# Altium PCB flowSensorV2.PcbDoc
Units mil, origin at the board's own origin, x right, y up, seen from the top; angles counter-clockwise.
Board outline 700 x 1550 mil, 2 copper layers (Top Layer, Bottom Layer); 19 components, 8 nets, 30 pads, 2 vias.
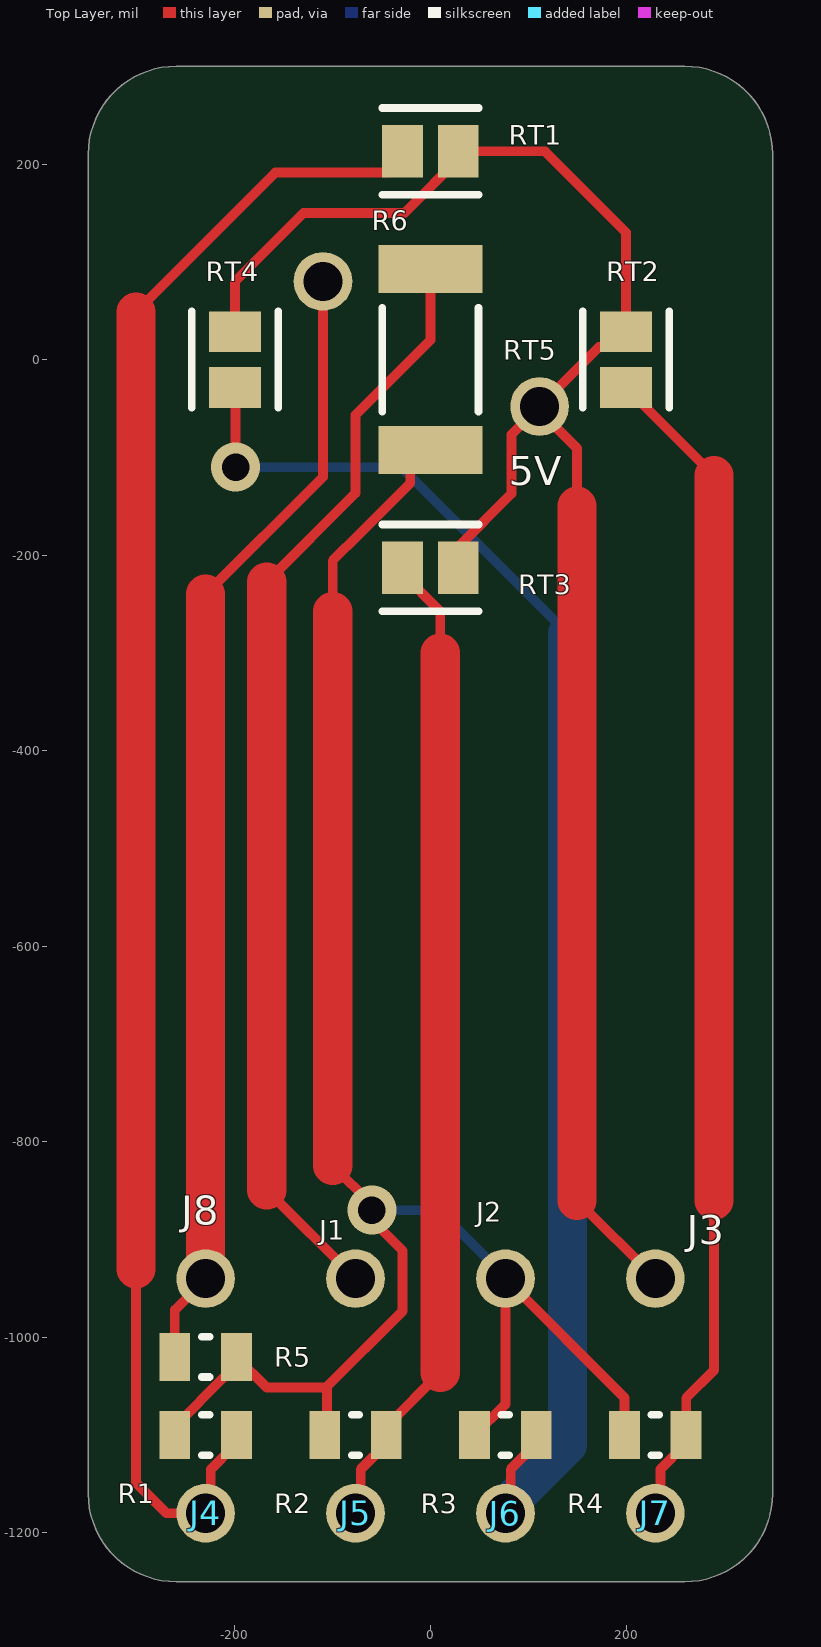
[diagram p0: Top Layer view]
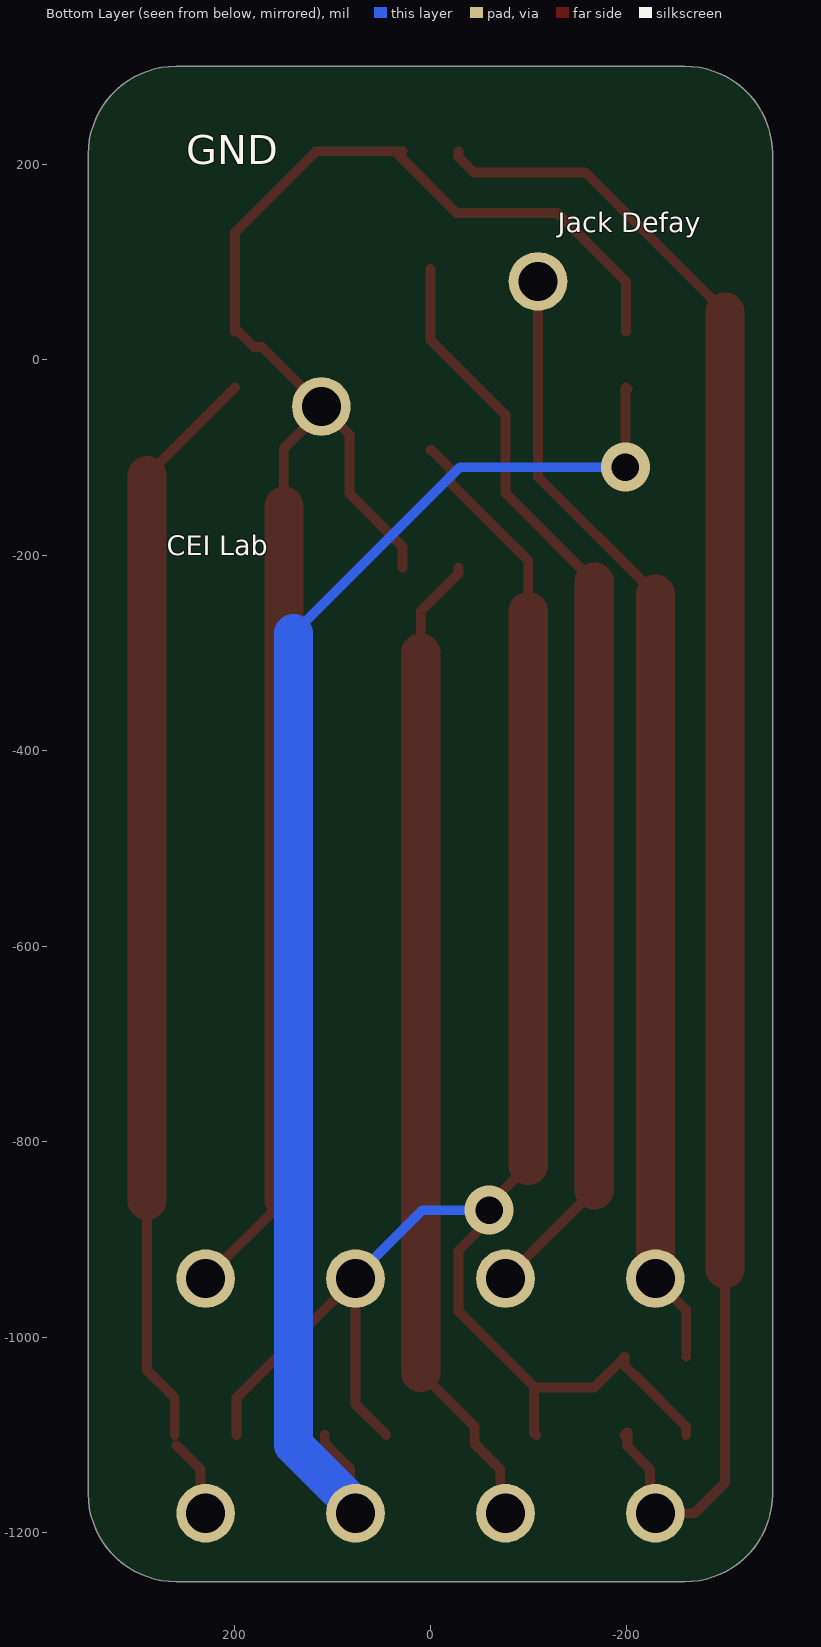
[diagram p1: Bottom Layer view, seen from below]
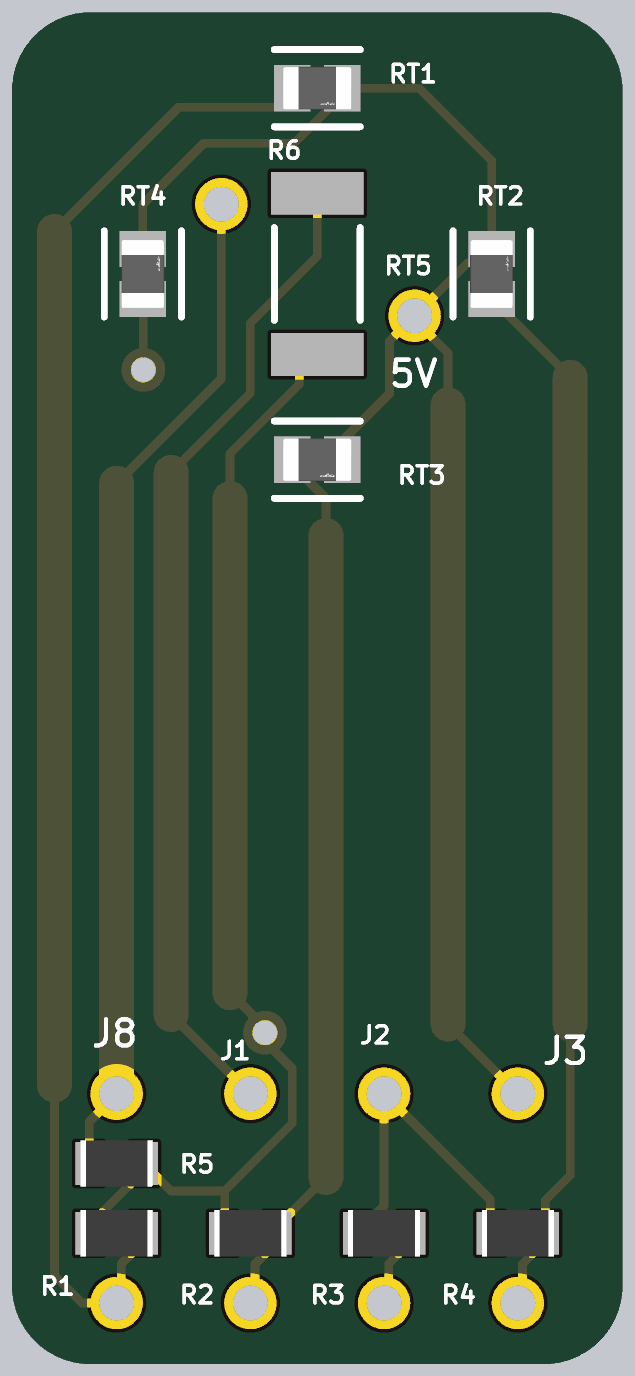
[diagram p2: 3D render of the assembled board from above, using the file's embedded part models]

## Layer stack, top to bottom
Top Solder: solder mask 0.4, Solder Resist, Dk 3.5
Top Layer: signal copper 1.4
Dielectric 1: dielectric 12.6, FR-4, Dk 4.8
Bottom Layer: signal copper 1.4
Bottom Solder: solder mask 0.4, Solder Resist, Dk 3.5

## Board outline
-350,-1160 ccw(c-260,-1160) -260,-1250 260,-1250 ccw(c260,-1160) 350,-1160 350,210 ccw(c260,210) 260,300 -260,300 ccw(c-260,210) -350,210
cut-out: -350,351.5

## Design rules (kind name [scope] priority, off if disabled: settings)
Clearance [All] p1: gap=4 ignorepadtopadclearanceinfootprint=FALSE except(0: Arc-Hole Track-Hole SMDPad-Hole THPad-Hole Via-Hole Fill-Hole Poly-Hole Region-Hole Text-Hole)
MinimumSolderMaskSliver [All] p1: minsoldermaskwidth=4
PolygonConnect [All] p1: connectstyle=Relief reliefconductorwidth=10 reliefentries=4 polygonreliefangle="90 Angle" airgapwidth=10
RoutingVias [All] p1: holewidth=28 width=50 viastyle="Through Hole" minholewidth=28 minwidth=50 maxholewidth=28 maxwidth=50
SilkToSolderMaskClearance [IsPad] p1: minsilkscreentomaskgap=5 clearancetoexposedcopper=TRUE
SolderMaskExpansion [All] p1: expansion=4 istentingtop=FALSE
Width [All] p1: maxlimit=50 minlimit=10 preferedwidth=10 minimp=50.000000 maximp=50.000000 favimp=50.000000
28 further rules are at their usual default settings.

## Classes and differential pairs
component class [04]-Connector: J1 J2 J3 J4 J5 J6 J7 J8
component class "[03]-Heating Element": R6
component class [02]-Thermistors: R1 R3 R4 R5 RT5

## Components (designator, comment, footprint, x,y, rotation, side; value= is the part's Value field where it differs from the comment)
J1 "20v" PIN#1 -76.67,-940 r0 top
J2 "GND" PIN#1 76.67,-940 r0 top
J3 "20v" PIN#1 230,-940 r0 top
J4 "GND" PIN#1 -230,-1180 r0 top
J5 "GND" PIN#1 -76.67,-1180 r0 top
J6 "GND" PIN#1 76.67,-1180 r0 top
J7 "GND" PIN#2 205.94,-1180 r0 top
J8 "GND" PIN#1 -230,-940 r0 top
R1 "RC0805FR-0710KL" RESC2013X60X35LL10T20 -230,-1100 r0 top
R2 "RC0805FR-0710KL" RESC2013X60X35LL10T20 -76.67,-1100 r0 top (schematic designator R3)
R3 "RC0805FR-0710KL" RESC2013X60X35LL10T20 76.67,-1100 r0 top (schematic designator R4)
R4 "RC0805FR-0710KL" RESC2013X60X35LL10T20 230,-1100 r0 top (schematic designator R2)
R5 "RC0805FR-0710KL" RESC2013X60X35LL10T20 -230,-1020 r180 top
R6 "16R9 1% 2010(5025)" RESC2010(5025)_N 0,0 r90 top value="16.90 Ohm"
RT1 "NCP21XV103J03RA" FP-NCP21-0_2-IPC_C 0,213 r0 top
RT2 "NCP21XV103J03RA" FP-NCP21-0_2-IPC_C 200,0 r90 top
RT3 "NCP21XV103J03RA" FP-NCP21-0_2-IPC_C 0,-213 r0 top
RT4 "NCP21XV103J03RA" FP-NCP21-0_2-IPC_C -200,0 r90 top
RT5 "" thermistor -110,80 r330 top

## Footprints (in the part's own frame and the unit in brackets; to place one, negate y for a bottom-side part, rotate by r counter-clockwise, add the part's x,y. Pads: shape width x height; smd on the part's side, far side on the other; paste and mask are expansions set on the pad)
FP-NCP21-0_2-IPC_C [mil]
  rect 41.52x53.39 smd paste+0 mask+0: 1(-28.57,0) 2(28.57,0)
  silkscreen extent -49,-44 49,44, body extent -53,-32 53,32, height 10
PIN#1 [mil]
  round 60 hole 40: 1(0,0)
PIN#2 [mil]
  round 60 hole 40: 1(24.06,0)
RESC2010(5025)_N [mm] "Chip Resistor, Body 5.0x2.5mm, IPC Medium Density"
  rect 1.25x2.7 smd: 1(-2.35,0) 2(2.35,0)
  silkscreen extent -1.35,-1.25 1.35,1.25, body extent -2.6,-1.35 2.6,1.35, height 0.71
RESC2013X60X35LL10T20 [mm] "Chip Resistor, 2-Leads, Body 2.1x1.35mm, IPC High Density"
  rect 0.8x1.25 smd: 1(-0.8,0) 2(0.8,0)
  silkscreen extent -0.1,-0.53 0.1,0.53, body extent -1.05,-0.67 1.05,0.68, height 0.6
thermistor [mil]
  round 60 hole 40: 0(0,0) 1(255.91,0)

## Part data
R1 R2 R3 R4 R5: library part CMP-1659-00013-4, "Chip Resistor, 10 KOhm, +/- 1%, 0.125 W, -55 to 155 degC, 0805 (2012 Metric), RoHS, Tape and Reel", Manufacturer=Yageo, Max Operating Temperature="155 degC", Min Operating Temperature="-55 degC", Package Quantity=5000, Voltage Rating="150 V", ComponentLink1Description="Manufacturer URL", ComponentLink1URL=http://www.yageo.com/, ComponentLink2Description=Datasheet, ComponentLink2URL=http://www.yageo.com/documents/recent/PYu-RC_Group_51_RoHS_L_04.pdf, DatasheetVersion="Rev. 4, 02/2016", Height="0.5 mm", Length="2 mm", Mount="Surface Mount", Mounting Technology="Surface Mount", PackageDescription="2-Pin Surface Mounted Device, Body 2 x 1.25 mm", PackageReference=0805, Packaging="Tape and Reel", Pins=2, REACH SVHC="No SVHC", RoHSCompliant=true
R6: library part CMP-1017-00308-1, "16R9 0.75W 1% 2010 (5025 Metric)  SMD", Case-EIA=2010, Case-Metric=5025, Power="0.75 W", Tolerance="1 %", Technology=SMT
RT1 RT2 RT3 RT4: library part CMP-2000-06827-2, "THERMISTOR NTC 10KOHM 3900K 0805", Case Code (Imperial)=0805, Case Code (Metric)=2012, Current Rating=440uA, Max Operating Temperature=125°C, Max Power Dissipation=200mW, Min Operating Temperature=-40°C, Package Quantity=4000, Resistance=10kR, Tolerance=5%, Accuracy=3%, Case/Package=0805, Depth=1.25mm, Height=0.85mm, Lead Free="Lead Free", Length=2mm, Mount="Surface Mount", Number of Pins=2, Packaging="Tape and Reel", Power Rating=200mW, Radiation Hardening=No, REACH SVHC="No SVHC", Termination=SMD/SMT, Thickness=150um
RT5: library part thermistor

## Via types
v1: diameter 50, hole 28, Top Layer to Bottom Layer, tented both sides, 2 vias

## Nets (pads, with @x,y where several pads share a name; then routed paths per layer and width w, separated by ;. In a path a pad name is that pad's centre, name@x,y a point inside that pad or via, vN(x,y) a via of type N, cw(c..) or ccw(c..) an arc to the next point about the centre after c; other vN are vias at no path point)
5V: J3.1 RT1.2 RT2.2 RT3.2 RT4.2 RT5.1 | length 1906.8
  Top Layer w10: RT4.2 -200,80 -130,150 -26.58,150 RT1.2@32.48,209.06 ; RT3.2 28.57,-191.43 82.83,-137.17 82.83,-76.74 RT5.1 ; RT1.2 117,213 200,130 RT2.2@200,32.48 ; 150,-860 J3.1 ; 150,-150 150,-90.69 111.62,-52.32 RT5.1 ; RT2.2 RT2.2@200,32.48 ; RT5.1 172.45,12.87 180.39,12.87 RT2.2@200,32.48
  Top Layer w40: 150,-860 150,-150
15V: J1.1 R6.2 | length 1139.5
  Top Layer w10: -167.49,-849.17 J1.1 ; -167.49,-227.49 -76.67,-136.67 -76.67,-56.67 0,20 R6.2
  Top Layer w40: -167.49,-849.17 -167.49,-227.49
GND: J2.1 R1.1 R2.1 R3.1 R4.1 R5.1 R6.1 | length 1881.1
  Top Layer w10: R1.1 -261.5,-1091.14 -209.96,-1039.61 -209.25,-1039.61 -198.5,-1028.86 R5.1@-198.5,-1020.49 ; R5.1 R5.1@-198.5,-1020.49 ; R2.1 -105.94,-1097.78 -105.94,-1051.5 -106.68,-1051.5 ; -100,-824.14 -60,-864.14 -60,-880 -28.57,-911.43 -28.57,-973.39 -106.68,-1051.5 ; -100,-257.51 -100,-205.67 -71.64,-177.3 -20.6,-126.27 -20.6,-112.13 -1,-92.52 R6.1 ; R3.1 76.67,-1068.5 J2.1 198.5,-1061.84 R4.1 ; R5.1@-198.5,-1020.49 -167.49,-1051.5 -106.68,-1051.5
  Top Layer w40: -100,-824.14 -100,-257.51
  Bottom Layer w10: v1(-60,-870) 8.33,-870 76.67,-938.33 J2.1 J2.1@70,-940
read0: J8.1 R5.2 RT5.0 | length 1162.8
  Top Layer w10: R5.2 -261.5,-972.14 -230,-940.65 J8.1 ; -230,-240 -110,-120 RT5.0
  Top Layer w40: J8.1 -230,-240
read1: J4.1 R1.2 RT1.1 | length 1724.8
  Top Layer w10: -301.24,-930 -301.24,-1148.76 -270,-1180 J4.1 -224.65,-1174.65 -224.65,-1135 -201.43,-1111.78 -201.43,-1097.08 R1.2 ; -301.24,48.76 -158.7,191.3 -44.33,191.3 -28.57,207.06 RT1.1
  Top Layer w40: -301.24,-930 -301.24,48.76
read2: J5.1 R2.2 RT3.1 | length 1018.9
  Top Layer w10: J5.1 -71.31,-1174.65 -71.31,-1135 -45.17,-1108.86 R2.2 -45.17,-1091.14 10,-1035.97 ; RT3.1 -28.57,-218.94 10,-257.51 10,-300
  Top Layer w40: 10,-1035.97 10,-300
read3: J6.1 R3.2 RT4.1 | length 1512.8
  Top Layer w10: RT4.1@-201.43,-30 RT4.1 -199.36,-29.21 v1(-199.36,-110) ; J6.1 82.02,-1174.65 82.02,-1135 108.16,-1108.86 R3.2
  Bottom Layer w10: v1(-199.36,-110) -30,-110 140,-280 ; J6.1 J6.1@76.67,-1173.33
  Bottom Layer w40: J6.1@76.67,-1173.33 140,-1110 140,-280
read4: J7.1 R4.2 RT2.1 | length 1202.6
  Top Layer w10: RT2.1 290,-118.57 ; J7.1 235.35,-1174.65 235.35,-1135 R4.2@260,-1110.35 ; R4.2 261.5,-1062.24 290,-1033.74 290,-860
  Top Layer w40: 290,-860 290,-118.57

## Silkscreen, mask and mechanical layers (free items; w line width, h text height)
Top Overlay:
  text "5V" at 80,-128.5 h30
Bottom Overlay:
  text "GND" at 250,200 h30
  text "Jack Defay" at -130,130 h20
  text "CEI Lab" at 270,-200 h20
Board_Outline:
  the board outline again, w10